# EAGLE board p8x-alu-card-full (EAGLE 9.6.2)
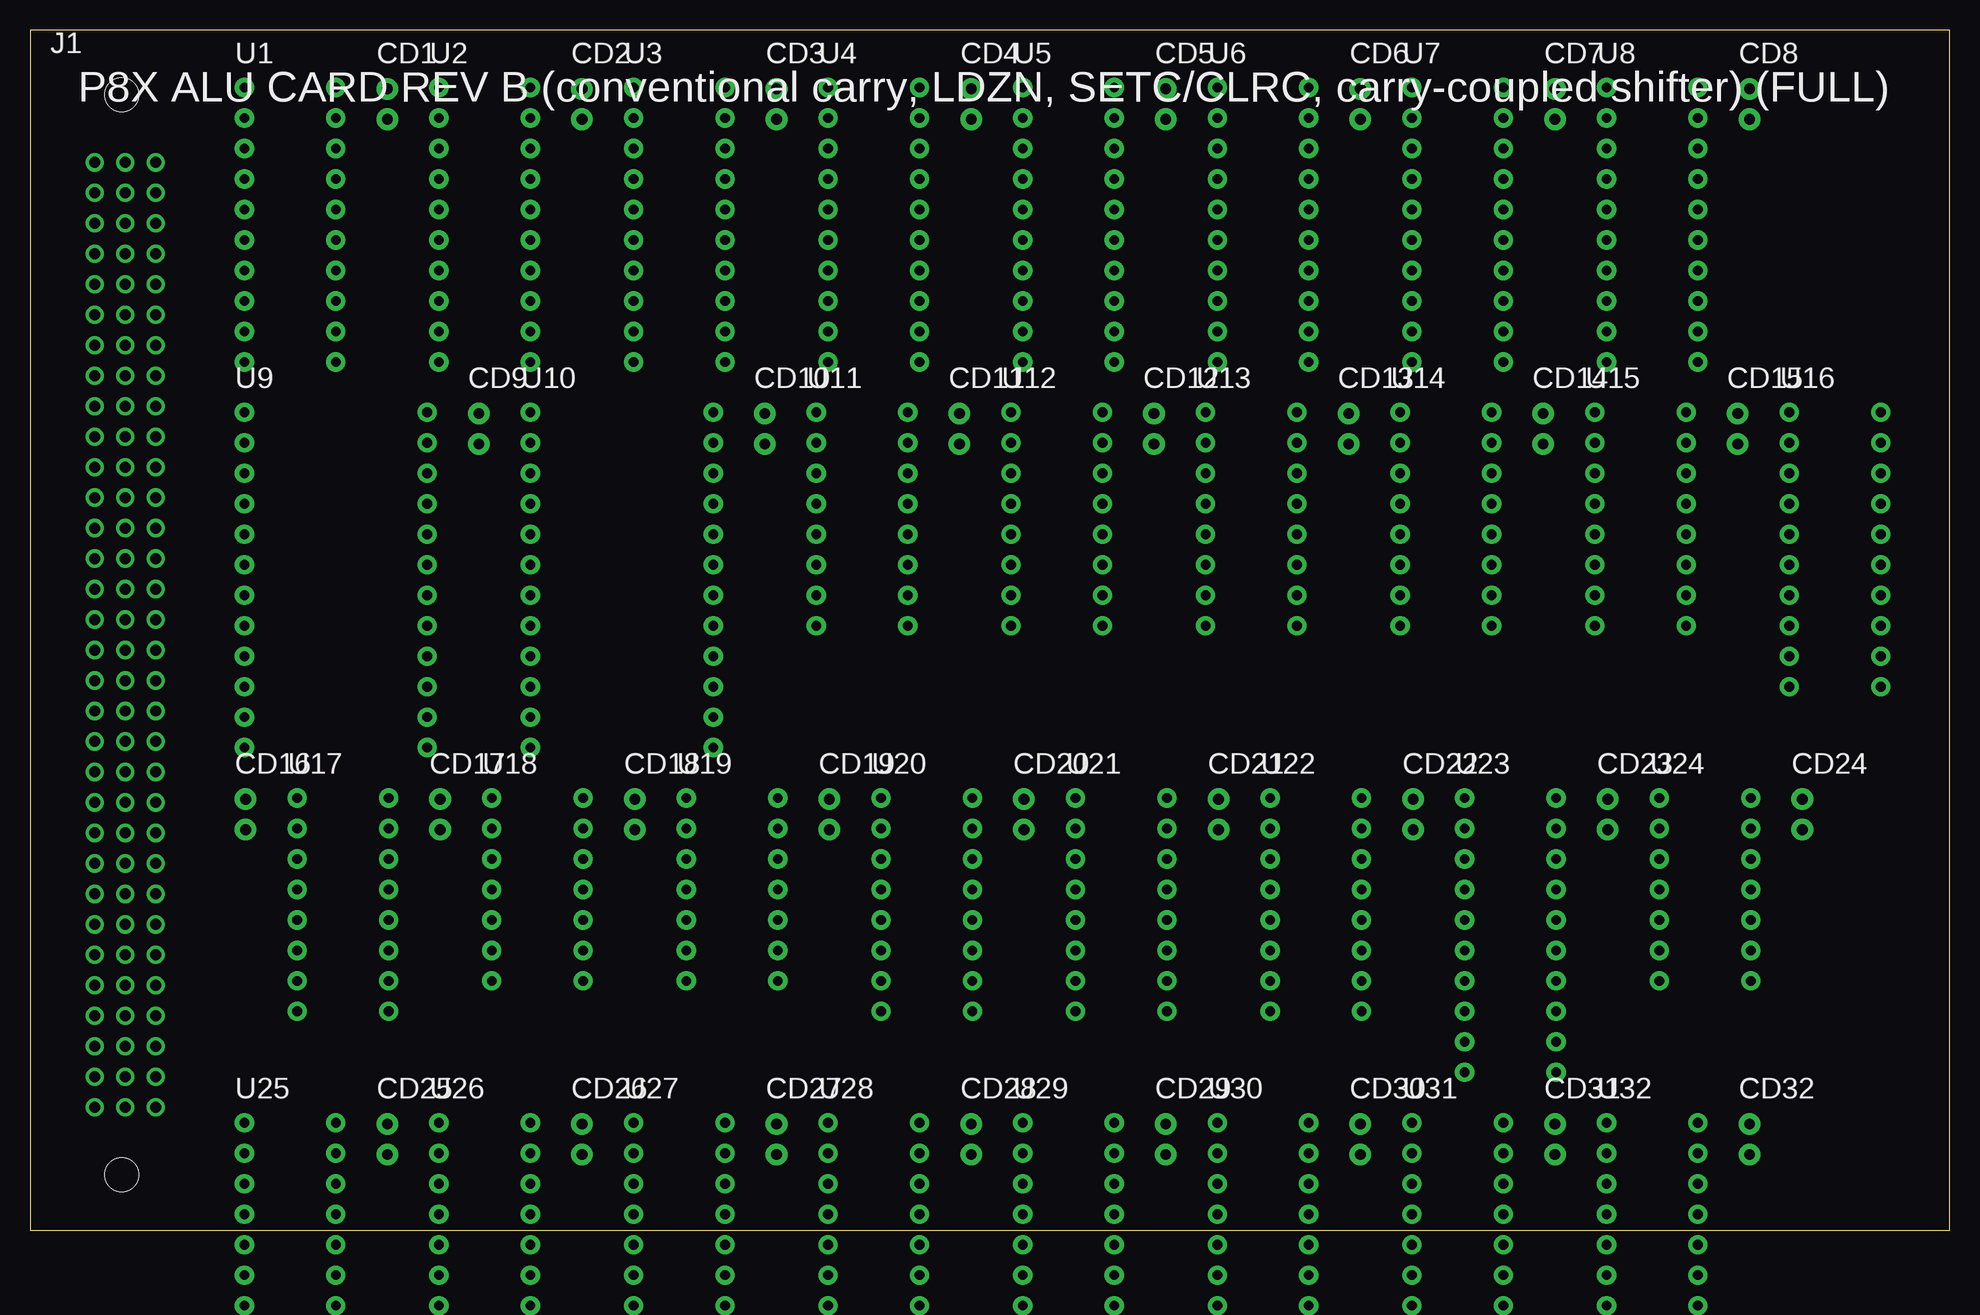
[diagram p0: board, top side]
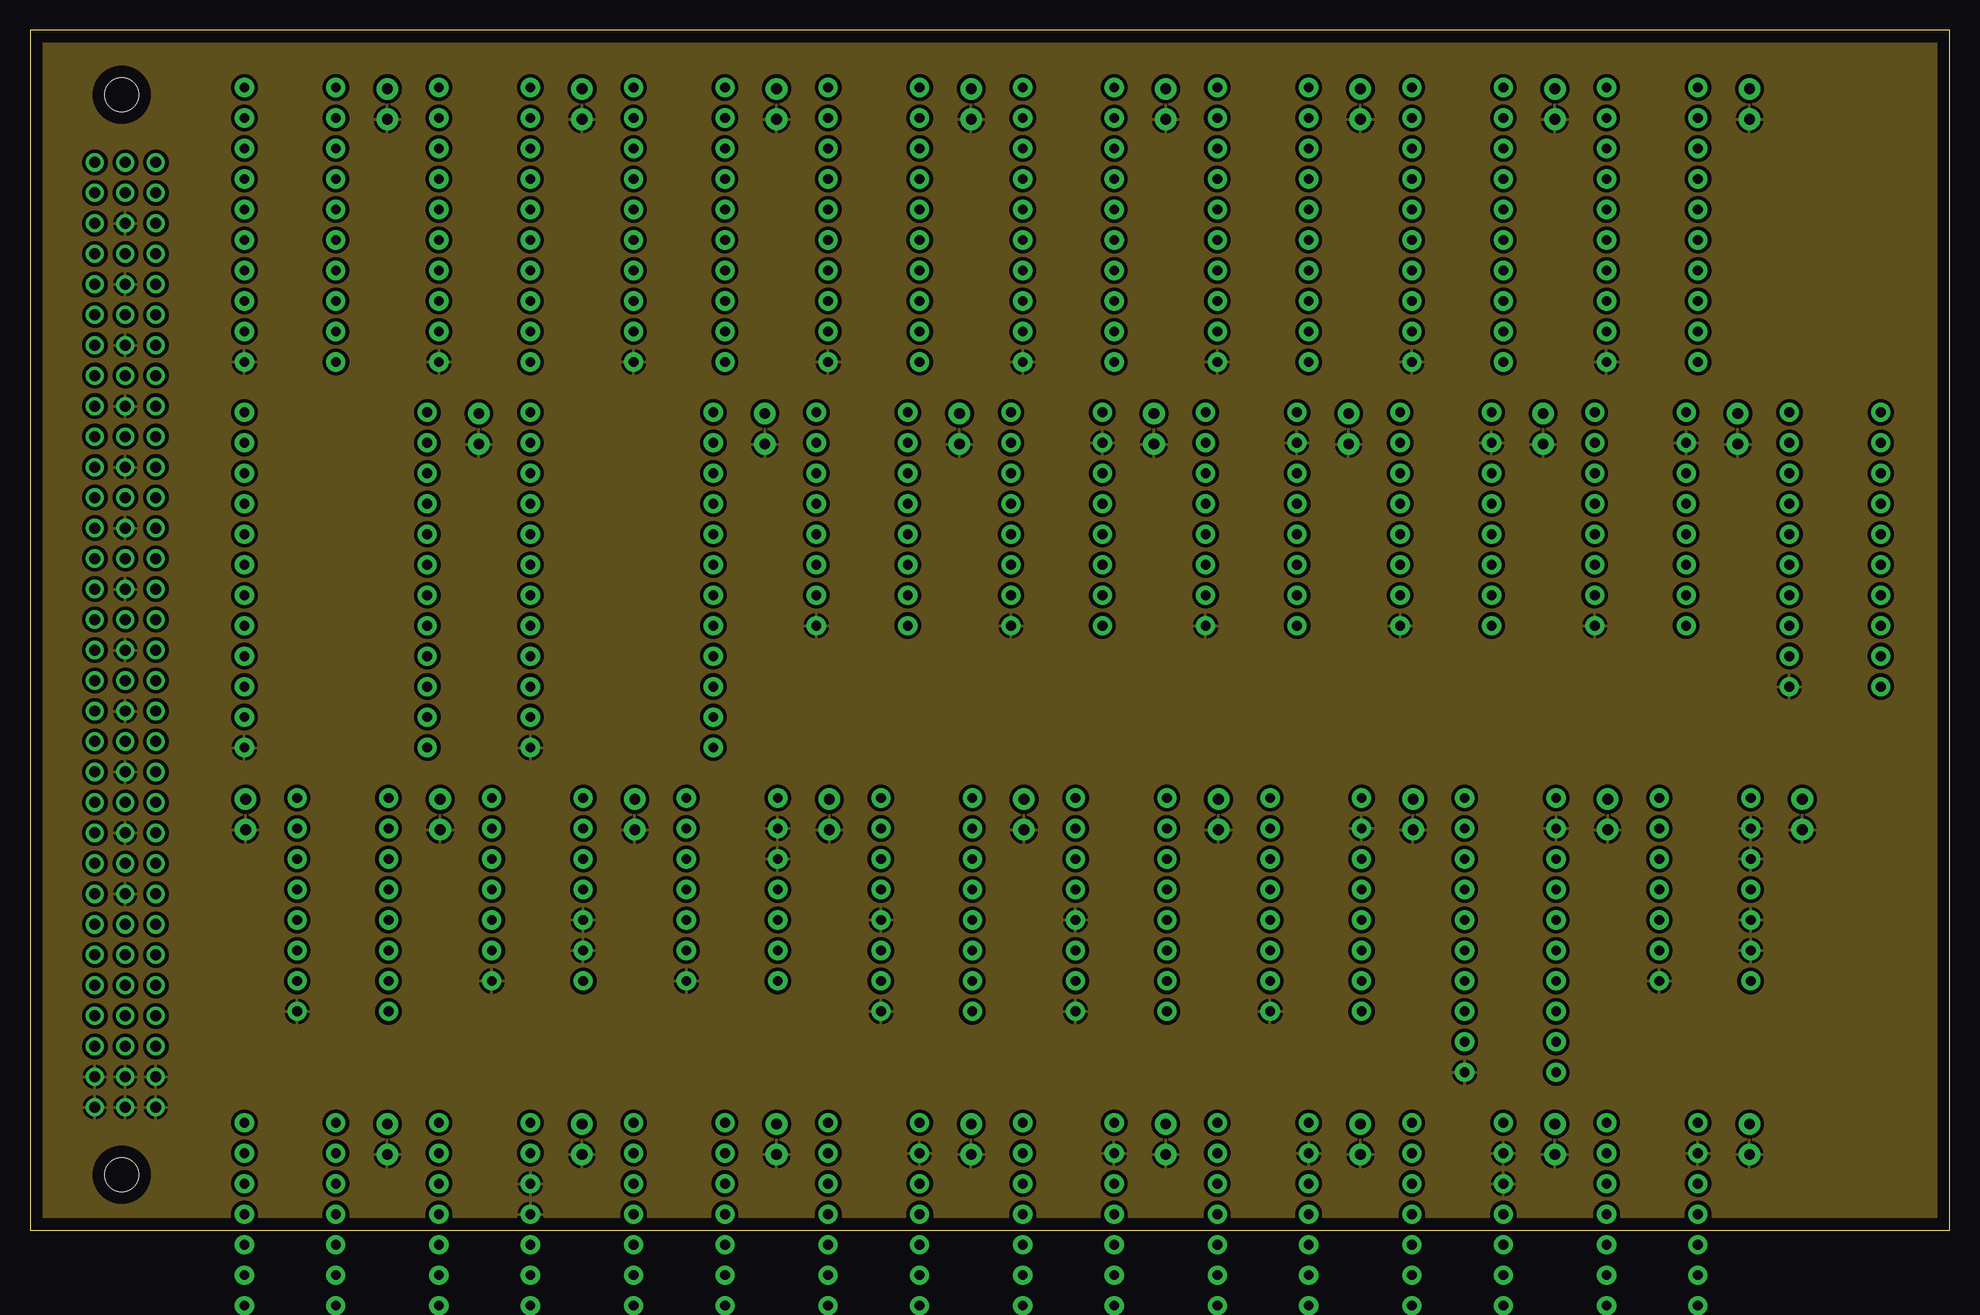
[diagram p1: board, inner layer Route2]
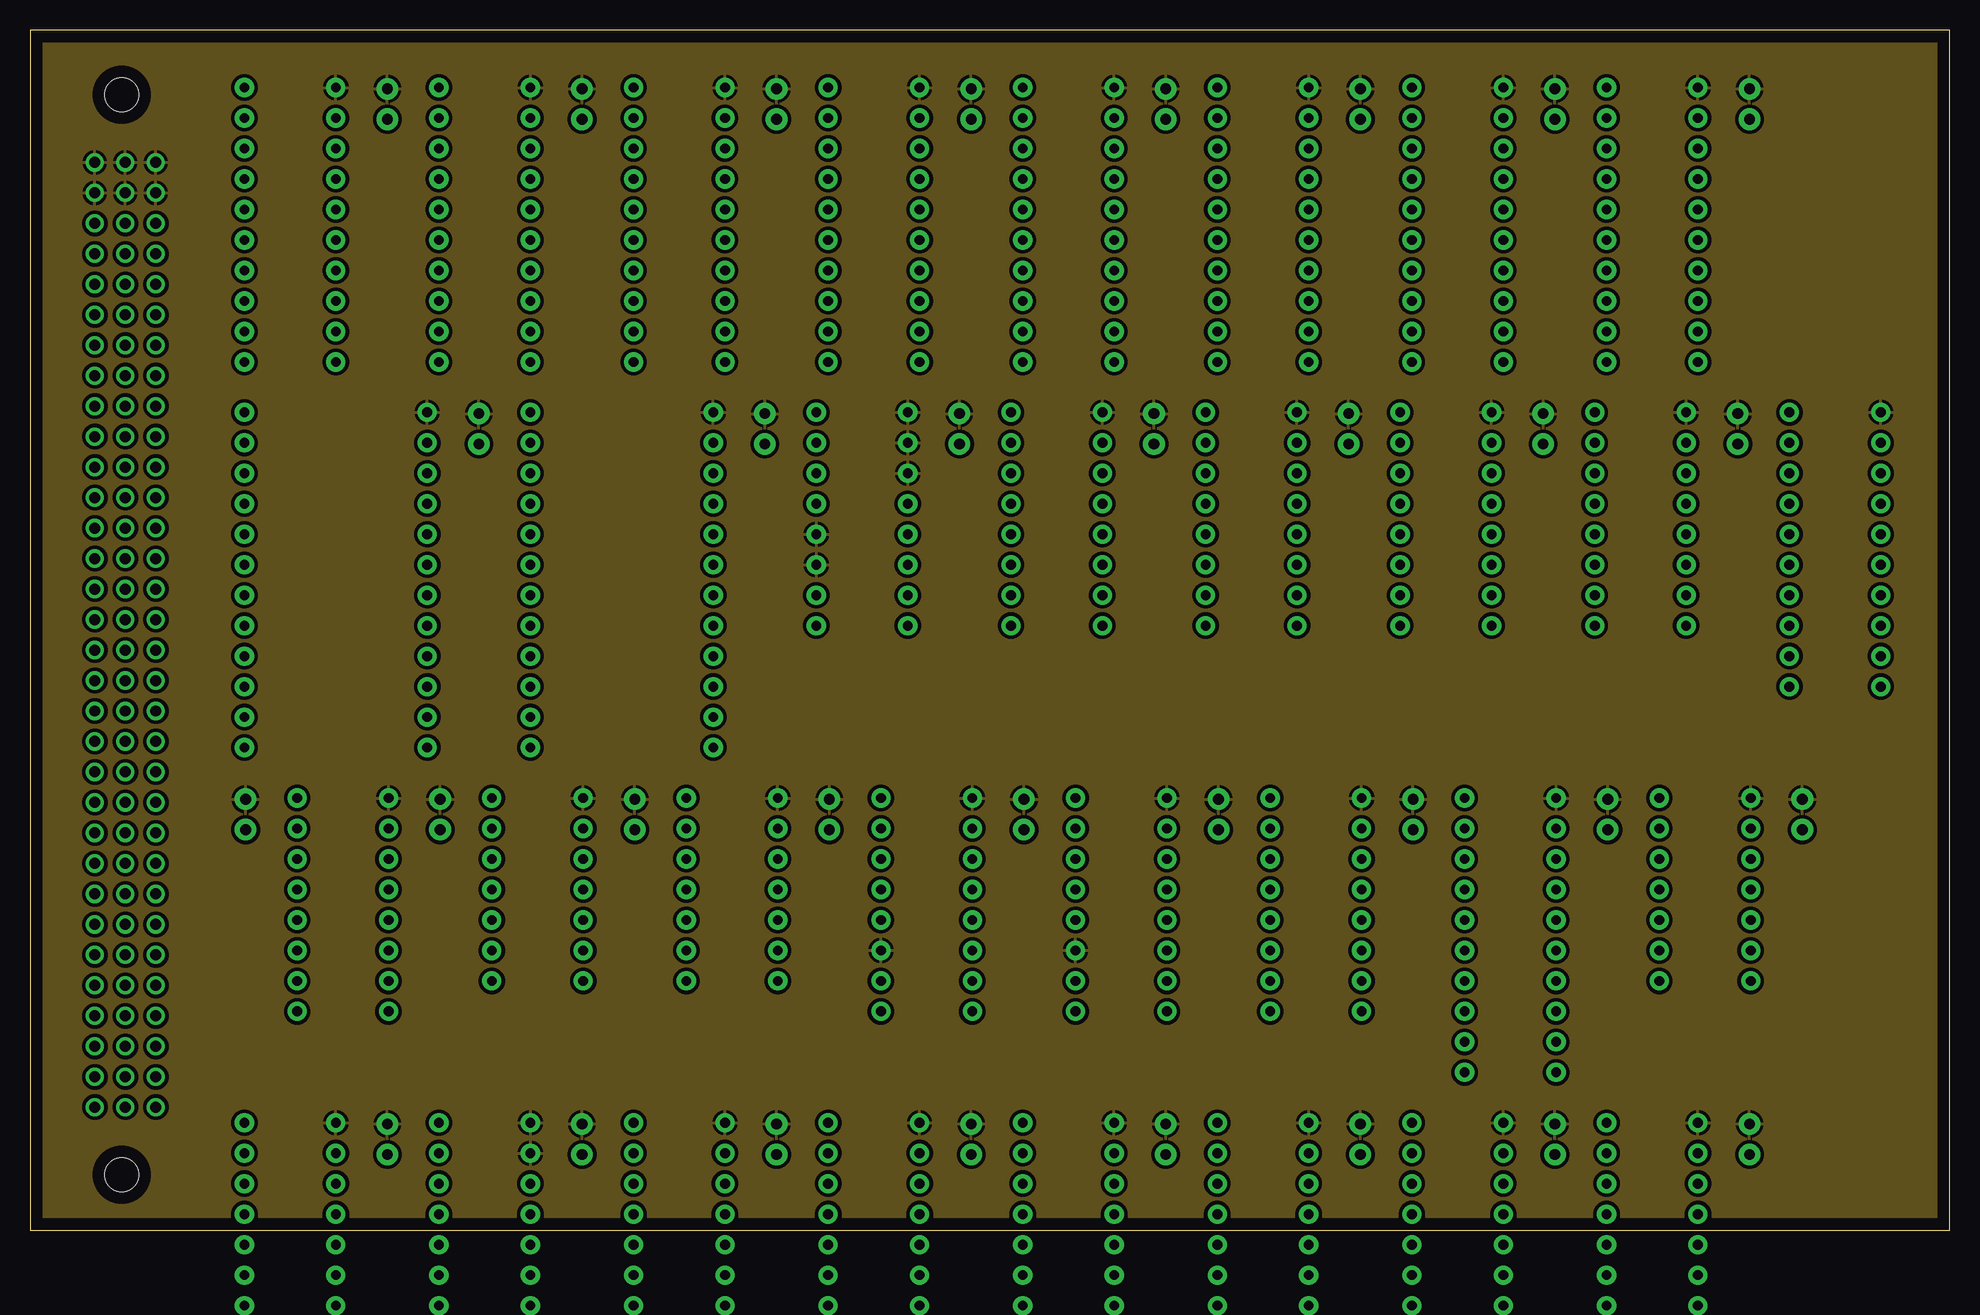
[diagram p2: board, inner layer Route15]

Size 160 x 100 mm. Coordinates in mm from the lower left corner, seen from the top.
Outline: 0,0 160,0 160,100 0,100 0,0
Copper layers (1*2*15*16): Top / Route2 / Route15 / Bottom

## Footprints (pad centres in the part's own frame; a part is rotated, then mirrored left to right if it is on the bottom)
C_DISC1 = drill 0.9 pad 1.8: 1 0,0; 2 0,-2.54
MABC96R = drill 0.914 pad 1.524: A1 -2.54,39.37; A2 -2.54,36.83; A3 -2.54,34.29; A4 -2.54,31.75; A5 -2.54,29.21; A6 -2.54,26.67; A7 -2.54,24.13; A8 -2.54,21.59; A9 -2.54,19.05; A10 -2.54,16.51; A11 -2.54,13.97; A12 -2.54,11.43; A13 -2.54,8.89; A14 -2.54,6.35; A15 -2.54,3.81; A16 -2.54,1.27; A17 -2.54,-1.27; A18 -2.54,-3.81; A19 -2.54,-6.35; A20 -2.54,-8.89; A21 -2.54,-11.43; A22 -2.54,-13.97; A23 -2.54,-16.51; A24 -2.54,-19.05; A25 -2.54,-21.59; A26 -2.54,-24.13; A27 -2.54,-26.67; A28 -2.54,-29.21; A29 -2.54,-31.75; A30 -2.54,-34.29; A31 -2.54,-36.83; A32 -2.54,-39.37; B1 0,39.37; B2 0,36.83; B3 0,34.29; B4 0,31.75; B5 0,29.21; B6 0,26.67; B7 0,24.13; B8 0,21.59; B9 0,19.05; B10 0,16.51; B11 0,13.97; B12 0,11.43; B13 0,8.89; B14 0,6.35; B15 0,3.81; B16 0,1.27; B17 0,-1.27; B18 0,-3.81; B19 0,-6.35; B20 0,-8.89; B21 0,-11.43; B22 0,-13.97; B23 0,-16.51; B24 0,-19.05; B25 0,-21.59; B26 0,-24.13; B27 0,-26.67; B28 0,-29.21; B29 0,-31.75; B30 0,-34.29; B31 0,-36.83; B32 0,-39.37; C1 2.54,39.37; C2 2.54,36.83; C3 2.54,34.29; C4 2.54,31.75; C5 2.54,29.21; C6 2.54,26.67; C7 2.54,24.13; C8 2.54,21.59; C9 2.54,19.05; C10 2.54,16.51; C11 2.54,13.97; C12 2.54,11.43; C13 2.54,8.89; C14 2.54,6.35; C15 2.54,3.81; C16 2.54,1.27; C17 2.54,-1.27; C18 2.54,-3.81; C19 2.54,-6.35; C20 2.54,-8.89; C21 2.54,-11.43; C22 2.54,-13.97; C23 2.54,-16.51; C24 2.54,-19.05; C25 2.54,-21.59; C26 2.54,-24.13; C27 2.54,-26.67; C28 2.54,-29.21; C29 2.54,-31.75; C30 2.54,-34.29; C31 2.54,-36.83; C32 2.54,-39.37 | hole 2.794: -0.3,45; -0.3,-45
LED5 = drill 0.9 pad 1.8: 1 2.54,0; 2 0,0
R_AXIAL = drill 0.8 pad 1.6: 1 0,0; 2 10.16,0
DIP20 = drill 0.813 pad 1.6: 1 0,0; 2 0,-2.54; 3 0,-5.08; 4 0,-7.62; 5 0,-10.16; 6 0,-12.7; 7 0,-15.24; 8 0,-17.78; 9 0,-20.32; 10 0,-22.86; 11 7.62,-22.86; 12 7.62,-20.32; 13 7.62,-17.78; 14 7.62,-15.24; 15 7.62,-12.7; 16 7.62,-10.16; 17 7.62,-7.62; 18 7.62,-5.08; 19 7.62,-2.54; 20 7.62,0
DIP24W = drill 0.813 pad 1.6: 1 0,0; 2 0,-2.54; 3 0,-5.08; 4 0,-7.62; 5 0,-10.16; 6 0,-12.7; 7 0,-15.24; 8 0,-17.78; 9 0,-20.32; 10 0,-22.86; 11 0,-25.4; 12 0,-27.94; 13 15.24,-27.94; 14 15.24,-25.4; 15 15.24,-22.86; 16 15.24,-20.32; 17 15.24,-17.78; 18 15.24,-15.24; 19 15.24,-12.7; 20 15.24,-10.16; 21 15.24,-7.62; 22 15.24,-5.08; 23 15.24,-2.54; 24 15.24,0
DIP16 = drill 0.813 pad 1.6: 1 0,0; 2 0,-2.54; 3 0,-5.08; 4 0,-7.62; 5 0,-10.16; 6 0,-12.7; 7 0,-15.24; 8 0,-17.78; 9 7.62,-17.78; 10 7.62,-15.24; 11 7.62,-12.7; 12 7.62,-10.16; 13 7.62,-7.62; 14 7.62,-5.08; 15 7.62,-2.54; 16 7.62,0
DIP14 = drill 0.813 pad 1.6: 1 0,0; 2 0,-2.54; 3 0,-5.08; 4 0,-7.62; 5 0,-10.16; 6 0,-12.7; 7 0,-15.24; 8 7.62,-15.24; 9 7.62,-12.7; 10 7.62,-10.16; 11 7.62,-7.62; 12 7.62,-5.08; 13 7.62,-2.54; 14 7.62,0

## Placement (x,y rotation side)
CD1  100nF  [C_DISC1]  29.79,95.1 0 top
CD2  100nF  [C_DISC1]  46.01,95.1 0 top
CD3  100nF  [C_DISC1]  62.23,95.1 0 top
CD4  100nF  [C_DISC1]  78.45,95.1 0 top
CD5  100nF  [C_DISC1]  94.67,95.1 0 top
CD6  100nF  [C_DISC1]  110.89,95.1 0 top
CD7  100nF  [C_DISC1]  127.11,95.1 0 top
CD8  100nF  [C_DISC1]  143.33,95.1 0 top
CD9  100nF  [C_DISC1]  37.41,68.04 0 top
CD10  100nF  [C_DISC1]  61.25,68.04 0 top
CD11  100nF  [C_DISC1]  77.47,68.04 0 top
CD12  100nF  [C_DISC1]  93.69,68.04 0 top
CD13  100nF  [C_DISC1]  109.91,68.04 0 top
CD14  100nF  [C_DISC1]  126.13,68.04 0 top
CD15  100nF  [C_DISC1]  142.35,68.04 0 top
CD16  100nF  [C_DISC1]  17.97,35.9 0 top
CD17  100nF  [C_DISC1]  34.19,35.9 0 top
CD18  100nF  [C_DISC1]  50.41,35.9 0 top
CD19  100nF  [C_DISC1]  66.63,35.9 0 top
CD20  100nF  [C_DISC1]  82.85,35.9 0 top
CD21  100nF  [C_DISC1]  99.07,35.9 0 top
CD22  100nF  [C_DISC1]  115.29,35.9 0 top
CD23  100nF  [C_DISC1]  131.51,35.9 0 top
CD24  100nF  [C_DISC1]  147.73,35.9 0 top
CD25  100nF  [C_DISC1]  29.79,8.84 0 top
CD26  100nF  [C_DISC1]  46.01,8.84 0 top
CD27  100nF  [C_DISC1]  62.23,8.84 0 top
CD28  100nF  [C_DISC1]  78.45,8.84 0 top
CD29  100nF  [C_DISC1]  94.67,8.84 0 top
CD30  100nF  [C_DISC1]  110.89,8.84 0 top
CD31  100nF  [C_DISC1]  127.11,8.84 0 top
CD32  100nF  [C_DISC1]  143.33,8.84 0 top
CD33  100nF  [C_DISC1]  29.79,-13.14 0 top  (outside the outline)
CD34  100nF  [C_DISC1]  46.01,-13.14 0 top  (outside the outline)
CD35  100nF  [C_DISC1]  62.23,-13.14 0 top  (outside the outline)
J1  MABC96R  [MABC96R]  7.94,49.6 0 top
LED3  GRN  [LED5]  80.99,-13.14 0 top  (outside the outline)
LED4  GRN  [LED5]  102.29,-13.14 0 top  (outside the outline)
LED5  YEL  [LED5]  123.59,-13.14 0 top  (outside the outline)
R4  1K  [R_AXIAL]  87.83,-13.04 0 top  (outside the outline)
R5  1K  [R_AXIAL]  109.13,-13.04 0 top  (outside the outline)
RP1  1K  [R_AXIAL]  66.53,-13.04 0 top  (outside the outline)
U1  74HCT377  [DIP20]  17.87,95.2 0 top
U2  74HCT244  [DIP20]  34.09,95.2 0 top
U3  74HCT377  [DIP20]  50.31,95.2 0 top
U4  74HCT244  [DIP20]  66.53,95.2 0 top
U5  74HCT377  [DIP20]  82.75,95.2 0 top
U6  74HCT244  [DIP20]  98.97,95.2 0 top
U7  74HCT377  [DIP20]  115.19,95.2 0 top
U8  74HCT244  [DIP20]  131.41,95.2 0 top
U9  74HCT181  [DIP24W]  17.87,68.14 0 top
U10  74HCT181  [DIP24W]  41.71,68.14 0 top
U11  74HCT182  [DIP16]  65.55,68.14 0 top
U12  74HCT157  [DIP16]  81.77,68.14 0 top
U13  74HCT157  [DIP16]  97.99,68.14 0 top
U14  74HCT157  [DIP16]  114.21,68.14 0 top
U15  74HCT157  [DIP16]  130.43,68.14 0 top
U16  74HCT244  [DIP20]  146.65,68.14 0 top
U17  FLAGS  [DIP16]  22.27,36 0 top
U18  74HCT260  [DIP14]  38.49,36 0 top
U19  74HCT08  [DIP14]  54.71,36 0 top
U20  74HCT138  [DIP16]  70.93,36 0 top
U21  74HCT138  [DIP16]  87.15,36 0 top
U22  74HCT157  [DIP16]  103.37,36 0 top
U23  74HCT244  [DIP20]  119.59,36 0 top
U24  74HCT32  [DIP14]  135.81,36 0 top
U25  74HCT00  [DIP14]  17.87,8.94 0 top
U26  74HCT74  [DIP14]  34.09,8.94 0 top
U27  74HCT260  [DIP14]  50.31,8.94 0 top
U28  74HCT157  [DIP16]  66.53,8.94 0 top
U29  74HCT157  [DIP16]  82.75,8.94 0 top
U30  74HCT157  [DIP16]  98.97,8.94 0 top
U31  74HCT08  [DIP14]  115.19,8.94 0 top
U32  74HCT157  [DIP16]  131.41,8.94 0 top
U33  74HCT157  [DIP16]  17.87,-13.04 0 top  (outside the outline)
U34  74HCT86  [DIP14]  34.09,-13.04 0 top  (outside the outline)
U35  74HCT08  [DIP14]  50.31,-13.04 0 top  (outside the outline)

## Library data of the parts
CD1-CD35 J1 LED3-LED5 R4 R5 RP1 U1-U35 = p8x

## Nets
-CCLR: U26.1 U31.8
-CLRCb: U25.11 U31.10
-DOEA: U2.1 U2.19 U20.14
-DOEALU: U16.1 U16.19 U19.9 U19.10 U20.10
-DOEB: U4.1 U4.19 U20.13
-DOEFLG: U20.9 U23.1
-DOET: U6.1 U6.19 U20.12
-DOET2: U8.1 U8.19 U20.11
-LDA: U1.1 U21.14
-LDB: U3.1 U21.13
-LDT: U5.1 U21.12
-LDT2: U7.1 U21.11
-RES: J1.A11 U17.1 U31.9
-SETCb: U25.3 U26.4
ALUK: LED4.1 U19.8
ALUM: J1.C23 U9.8 U10.8
ALUS0: J1.C19 U9.6 U10.6
ALUS1: J1.C20 U9.5 U10.5
ALUS2: J1.C21 U9.4 U10.4 U34.9
ALUS3: J1.C22 U9.3 U10.3
AQ0: U1.2 U2.2 U9.2
AQ1: U1.5 U2.4 U9.23
AQ2: U1.6 U2.6 U9.21
AQ3: U1.9 U2.8 U9.19
AQ4: U1.12 U2.11 U10.2
AQ5: U1.15 U2.13 U10.23
AQ6: U1.16 U2.15 U10.21
AQ7: U1.19 U2.17 U10.19 U34.1 U34.4
BMX0: U9.1 U32.4
BMX1: U9.22 U32.7
BMX2: U9.20 U32.9
BMX3: U9.18 U32.12
BMX4: U10.1 U33.4
BMX5: U10.22 U33.7
BMX6: U10.20 U33.9
BMX7: U10.18 U33.12 U34.5
BQ0: U3.2 U4.2 U32.2
BQ1: U3.5 U4.4 U32.5
BQ2: U3.6 U4.6 U32.11
BQ3: U3.9 U4.8 U32.14
BQ4: U3.12 U4.11 U33.2
BQ5: U3.15 U4.13 U33.5
BQ6: U3.16 U4.15 U33.11
BQ7: U3.19 U4.17 U33.14
BSEL: J1.B28 U32.1 U33.1
CFLG: U10.16 U25.4 U25.5
CFLGI: U25.6 U29.2
CG0: U9.17 U11.3
CG1: U10.17 U11.1
CIN: J1.C24 U9.7 U11.13 U30.2
CLK: J1.A24 U1.11 U3.11 U5.11 U7.11 U31.1 U31.5
CLKFC: U26.3 U31.3
CLKFZN: U17.9 U31.6
CLRC: J1.B27 U25.12 U25.13
CNX: U10.7 U11.12
CP0: U9.15 U11.4
CP1: U10.15 U11.2
D0: J1.A3 U1.3 U2.18 U3.3 U4.18 U5.3 U6.18 U7.3 U8.18 U16.18 U23.18 U27.1
D1: J1.A4 U1.4 U2.16 U3.4 U4.16 U5.4 U6.16 U7.4 U8.16 U16.16 U23.16 U27.2
D2: J1.A5 U1.7 U2.14 U3.7 U4.14 U5.7 U6.14 U7.7 U8.14 U16.14 U23.14 U27.11
D3: J1.A6 U1.8 U2.12 U3.8 U4.12 U5.8 U6.12 U7.8 U8.12 U16.12 U23.12 U27.12
D4: J1.A7 U1.13 U2.9 U3.13 U4.9 U5.13 U6.9 U7.13 U8.9 U16.9 U27.13
D5: J1.A8 U1.14 U2.7 U3.14 U4.7 U5.14 U6.7 U7.14 U8.7 U16.7 U27.3
D6: J1.A9 U1.17 U2.5 U3.17 U4.5 U5.17 U6.5 U7.17 U8.5 U16.5 U27.4
D7: J1.A10 U1.18 U2.3 U3.18 U4.3 U5.18 U6.3 U7.18 U8.3 U16.3 U22.6 U27.5
DLD0: J1.A16 U21.1
DLD1: J1.A17 U21.2
DLD2: J1.A18 U21.3
DLD3: J1.A19 U21.4
DOE0: J1.A12 U20.1
DOE1: J1.A13 U20.2
DOE2: J1.A14 U20.3
DOE3: J1.A15 U20.4
F0: U9.9 U12.2 U12.6 U28.2
F1: U9.10 U12.5 U12.10
F2: U9.11 U12.11 U12.13
F3: U9.13 U12.14 U13.3
F4: U10.9 U13.2 U13.6
F5: U10.10 U13.5 U13.10
F6: U10.11 U13.11 U13.13
F7: U10.13 U13.14 U28.3 U34.2
FC: J1.A27 U23.9
FENZN: U24.3 U31.4
FN: J1.A29 U23.5
FQC: U23.2 U23.11 U26.5 U30.3
FQN: U17.7 U23.6 U23.15
FQV: U17.10 U23.8 U23.17
FQZ: U17.2 U23.4 U23.13
FV: J1.A30 U23.3
FZ: J1.A28 U23.7
G0: U12.4 U14.2
G1: U12.7 U14.3 U14.5
G2: U12.9 U14.6 U14.11
G3: U12.12 U14.10 U14.14
G4: U13.4 U14.13 U15.2
G5: U13.7 U15.3 U15.5
G6: U13.9 U15.6 U15.11
G7: U13.12 U15.10 U15.14
GND: CD1.2 CD2.2 CD3.2 CD4.2 CD5.2 CD6.2 CD7.2 CD8.2 CD9.2 CD10.2 CD11.2 CD12.2 CD13.2 CD14.2 CD15.2 CD16.2 CD17.2 CD18.2 CD19.2 CD20.2 CD21.2 CD22.2 CD23.2 CD24.2 CD25.2 CD26.2 CD27.2 CD28.2 CD29.2 CD30.2 CD31.2 CD32.2 CD33.2 CD34.2 CD35.2 J1.A31 J1.A32 J1.B3 J1.B5 J1.B7 J1.B9 J1.B11 J1.B13 J1.B15 J1.B17 J1.B19 J1.B21 J1.B23 J1.B25 J1.B31 J1.B32 J1.C31 J1.C32 LED3.1 U1.10 U2.10 U3.10 U4.10 U5.10 U6.10 U7.10 U8.10 U9.12 U10.12 U11.8 U12.8 U12.15 U13.8 U13.15 U14.8 U14.15 U15.8 U15.15 U16.10 U17.8 U18.7 U18.9 U18.10 U19.7 U19.12 U19.13 U20.5 U20.8 U21.5 U21.8 U22.8 U22.15 U23.10 U23.19 U24.7 U24.9 U24.10 U24.12 U24.13 U25.7 U26.7 U26.11 U26.12 U27.7 U27.9 U27.10 U28.8 U28.15 U29.8 U29.15 U30.8 U30.15 U31.7 U31.12 U31.13 U32.8 U32.15 U33.8 U33.15 U34.7 U35.4 U35.5 U35.7 U35.9 U35.10 U35.12 U35.13
LDF: J1.A26 U24.1 U25.9 U25.10 U31.2
LDFK: LED5.1 U25.8
LDZN: J1.C28 U22.1 U24.2
LEDAL: LED4.2 R4.2
LEDLF: LED5.2 R5.2
LEDP: LED3.2 RP1.2
NC: U26.2 U29.4
NS2: U34.8 U34.13
NSRC: U17.5 U22.7
R0: U14.4 U16.2 U18.1
R1: U14.7 U16.4 U18.2
R2: U14.9 U16.6 U18.11
R3: U14.12 U16.8 U18.12
R4: U15.4 U16.11 U18.13
R5: U15.7 U16.13 U18.3
R6: U15.9 U16.15 U18.4
R7: U15.12 U16.17 U18.5 U22.5
SETC: J1.C30 U25.1 U25.2
SH0: J1.C25 U12.1 U13.1 U24.4 U28.1
SH1: J1.C26 U14.1 U15.1 U24.5
SHANY: U24.6 U29.1
SHCIN: J1.C29 U30.1
SHIN: U12.3 U15.13 U30.4
SHOUT: U28.4 U29.3
T2Q0: U7.2 U8.2
T2Q1: U7.5 U8.4
T2Q2: U7.6 U8.6
T2Q3: U7.9 U8.8
T2Q4: U7.12 U8.11
T2Q5: U7.15 U8.13
T2Q6: U7.16 U8.15
T2Q7: U7.19 U8.17
TQ0: U5.2 U6.2 U32.3
TQ1: U5.5 U6.4 U32.6
TQ2: U5.6 U6.6 U32.10
TQ3: U5.9 U6.8 U32.13
TQ4: U5.12 U6.11 U33.3
TQ5: U5.15 U6.13 U33.6
TQ6: U5.16 U6.15 U33.10
TQ7: U5.19 U6.17 U33.13
VCC: CD1.1 CD2.1 CD3.1 CD4.1 CD5.1 CD6.1 CD7.1 CD8.1 CD9.1 CD10.1 CD11.1 CD12.1 CD13.1 CD14.1 CD15.1 CD16.1 CD17.1 CD18.1 CD19.1 CD20.1 CD21.1 CD22.1 CD23.1 CD24.1 CD25.1 CD26.1 CD27.1 CD28.1 CD29.1 CD30.1 CD31.1 CD32.1 CD33.1 CD34.1 CD35.1 J1.A1 J1.A2 J1.B1 J1.B2 J1.C1 J1.C2 R4.1 R5.1 RP1.1 U1.20 U2.20 U3.20 U4.20 U5.20 U6.20 U7.20 U8.20 U9.24 U10.24 U11.5 U11.6 U11.14 U11.15 U11.16 U12.16 U13.16 U14.16 U15.16 U16.20 U17.16 U18.14 U19.14 U20.6 U20.16 U21.6 U21.16 U22.16 U23.20 U24.14 U25.14 U26.10 U26.13 U26.14 U27.14 U28.16 U29.16 U30.16 U31.14 U32.16 U33.16 U34.10 U34.14 U35.14
VSRC: U17.12 U35.3
VX1: U34.3 U35.1
VX2: U34.6 U34.12
VX4: U34.11 U35.2
ZBH: U19.5 U27.6
ZBL: U19.4 U27.8
ZBUS: U19.6 U22.3
ZFLG: U19.3 U22.2
ZH: U18.6 U19.2
ZL: U18.8 U19.1
ZSRC: U17.4 U22.4

## Tracks (layer width: path | path; a pad name or v marks a point on that pad's centre or on a via)
GND
  pour Route2 (isolate 0.3): 0,0 160,0 160,100 0,100
VCC
  pour Route15 (isolate 0.3): 0,0 160,0 160,100 0,100

## Text on the board
tPlace: P8X ALU CARD REV B (conventional carry, LDZN, SETC/CLRC, carry-coupled shifter) (FULL)